# Altium PCB PCB1.PcbDoc
Units mil, origin at the board's own origin, x right, y up, seen from the top; angles counter-clockwise.
Board outline 6000 x 4000 mil, 2 copper layers (Top Layer, Bottom Layer); 12 components, 12 nets, 40 pads, 0 vias.
Unrouted connection lines stored in the file: 1.
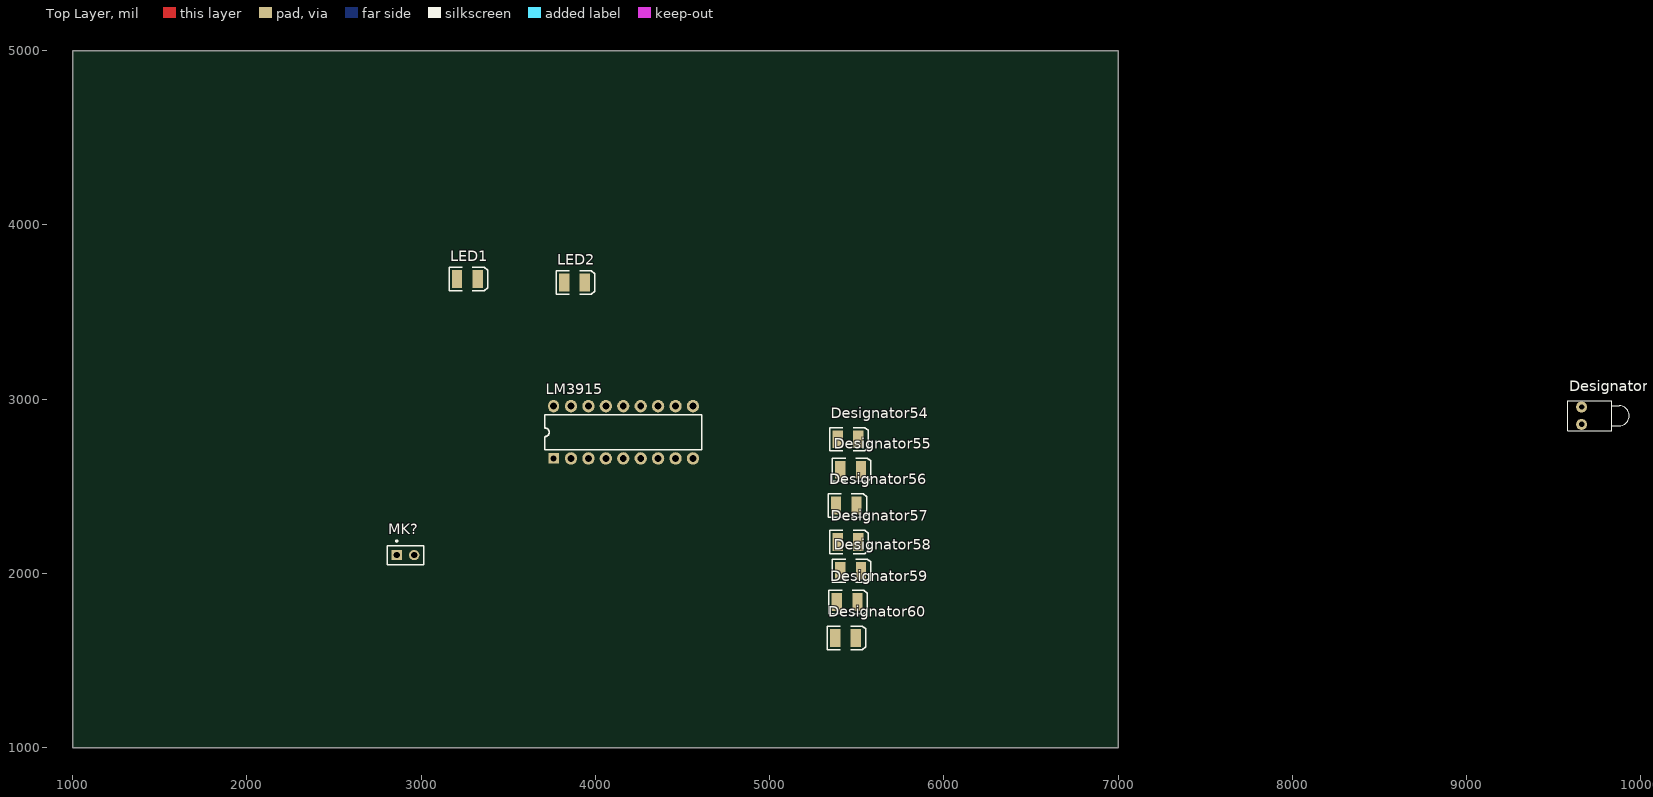
[diagram p0: Top Layer view]
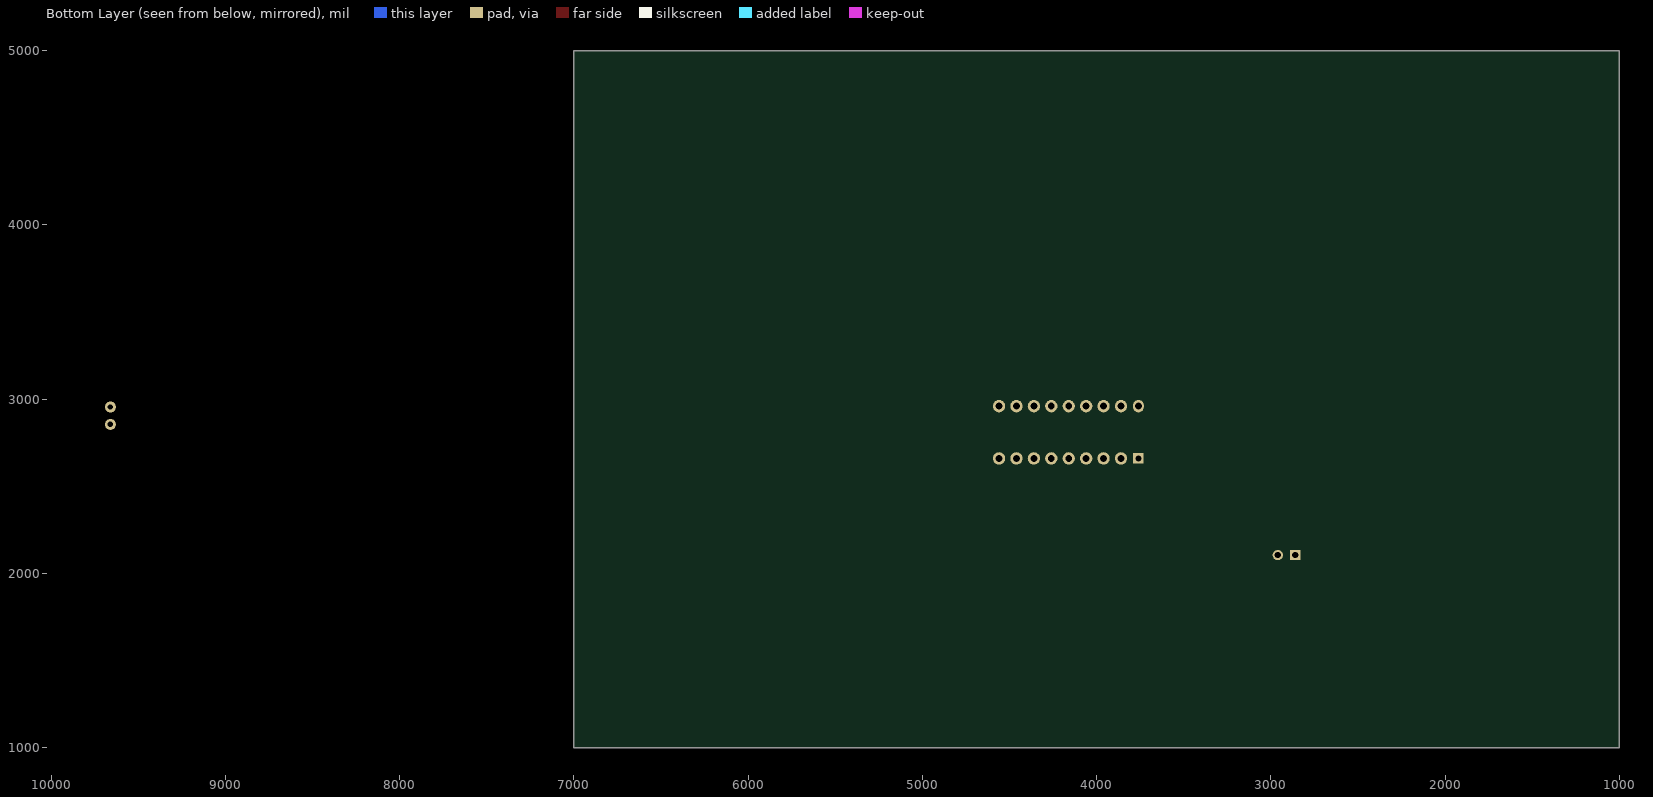
[diagram p1: Bottom Layer view, seen from below]

## Layer stack, top to bottom
Top Solder: solder mask 0.4, Solder Resist, Dk 3.5
Top Layer: signal copper 1.4
Dielectric 1: dielectric 12.6, FR-4, Dk 4.8
Bottom Layer: signal copper 1.4
Bottom Solder: solder mask 0.4, Solder Resist, Dk 3.5

## Board outline
1000,1000 7000,1000 7000,5000 1000,5000

## Design rules (kind name [scope] priority, off if disabled: settings)
Clearance [All] p1: gap=10 ignorepadtopadclearanceinfootprint=FALSE except(0: Arc-Hole Track-Hole SMDPad-Hole THPad-Hole Via-Hole Fill-Hole Poly-Hole Region-Hole Text-Hole)
PolygonConnect [All] p1: connectstyle=Relief reliefconductorwidth=10 reliefentries=4 polygonreliefangle="90 Angle" airgapwidth=10
RoutingVias [All] p1: holewidth=28 width=50 viastyle="Through Hole" minholewidth=28 minwidth=50 maxholewidth=28 maxwidth=50
SolderMaskExpansion [All] p1: expansion=4 istentingtop=FALSE
Width [All] p1: maxlimit=10 minlimit=10 preferedwidth=10
30 further rules are at their usual default settings.

## Classes and differential pairs
component class Sheet1: LM3915 MK?

## Components (designator, comment, footprint, x,y, rotation, side; value= is the part's Value field where it differs from the comment)
Designator51 "Comment" LED-1 9660,2905 r0 top
Designator54 "Comment" 3.5X2.8X1.9 5450,2770 r0 top
Designator55 "Comment" 3.5X2.8X1.9 5465,2595 r0 top
Designator56 "Comment" 3.5X2.8X1.9 5440,2390 r0 top
Designator57 "Comment" 3.5X2.8X1.9 5450,2180 r0 top
Designator58 "Comment" 3.5X2.8X1.9 5465,2015 r0 top
Designator59 "Comment" 3.5X2.8X1.9 5445,1835 r0 top
Designator60 "Comment" 3.5X2.8X1.9 5435,1630 r0 top
LED1 "Comment" 3.5X2.8X1.9 3265,3690 r0 top
LED2 "Comment" 3.5X2.8X1.9 3880,3670 r0 top
LM3915 "LM3915" LM3915 3760,2660 r90 top
MK? "Mic1" PIN2 2860,2105 r0 top

## Footprints (in the part's own frame and the unit in brackets; to place one, negate y for a bottom-side part, rotate by r counter-clockwise, add the part's x,y. Pads: shape width x height; smd on the part's side, far side on the other; paste and mask are expansions set on the pad)
3.5X2.8X1.9 [mm] "SM LED; 2 C-Bend Leads; Body 3.5 x 2.8 x 1.9 mm, inc leads (LxWxH typ)"
  rect 1.5x2.6 smd: 1(-1.5,0) 2(1.5,0)
  silkscreen extent -2.65,-1.7 2.95,1.7
LED-1 [mm] "LED; 2 Leads"
  round 1.6 hole 0.8: 1(0,1.27) 2(0,-1.27)
  silkscreen extent -2,-2.2 6.95,2.2
LM3915 [mm] "一款可以控制10个LED灯的电平IC"
  rect 1.524x1.524 hole 0.889: 1(0,0)
  round 1.8 hole 1: 2(0,-2.54) 3(0,-5.08) 4(0,-7.62) 5(0,-10.16) 6(0,-12.7) 7(0,-15.24) 8(0,-17.78) 9(0,-20.32) 10(7.62,-20.32) 11(7.62,-17.78) 12(7.62,-15.24) 13(7.62,-12.7) 14(7.62,-10.16) 15(7.62,-7.62) 16(7.62,-5.08) 17(7.62,-2.54)
  oval 1.8x1.6 hole 1: 18(7.62,0)
  silkscreen extent 1.27,-21.59 6.35,1.27
PIN2 [mm] "Photosensitive Diode; 2 Leads"
  rect 1.5x1.5 hole 0.9: 1(0,0)
  round 1.5 hole 0.9: 2(2.54,0)
  silkscreen extent -1.4,-1.4 3.94,2.17

## Part data
LM3915: "一款可以控制10个LED灯的电平IC"
MK?: "Microphone", LatestRevisionDate=17-Jul-2002, LatestRevisionNote="Re-released for DXP Platform.", PackageReference=PIN2, Published=24-Mar-1999, Publisher="Altium Limited"

## Nets (pads, with @x,y where several pads share a name; then routed paths per layer and width w, separated by ;. In a path a pad name is that pad's centre, name@x,y a point inside that pad or via, vN(x,y) a via of type N, cw(c..) or ccw(c..) an arc to the next point about the centre after c; other vN are vias at no path point)
GND: LM3915.2 LM3915.4
NetD1_1: 
NetD1_2: LM3915.1
NetD2_2: LM3915.18
NetD3_2: LM3915.17
NetD4_2: LM3915.16
NetD5_2: LM3915.15
NetD6_2: LM3915.14
NetD7_2: LM3915.13
NetD8_2: LM3915.12
NetD9_2: LM3915.11
NetD10_2: LM3915.10
pads on no net: Designator51.1 Designator51.2 Designator54.1 Designator54.2 Designator55.1 Designator55.2 Designator56.1 Designator56.2 Designator57.1 Designator57.2 Designator58.1 Designator58.2 Designator59.1 Designator59.2 Designator60.1 Designator60.2 LED1.1 LED1.2 LED2.1 LED2.2 LM3915.3 LM3915.5 LM3915.6 LM3915.7 LM3915.8 LM3915.9 MK?.1 MK?.2